# Altium PCB nfc-epd-sm.PcbDoc
Units mil, origin at the board's own origin, x right, y up, seen from the top; angles counter-clockwise.
Board outline 2244.09 x 1133.86 mil, 4 copper layers (Top Layer, GND Plane, Signal 1, Bottom Layer); 86 components, 74 nets, 282 pads, 68 vias.
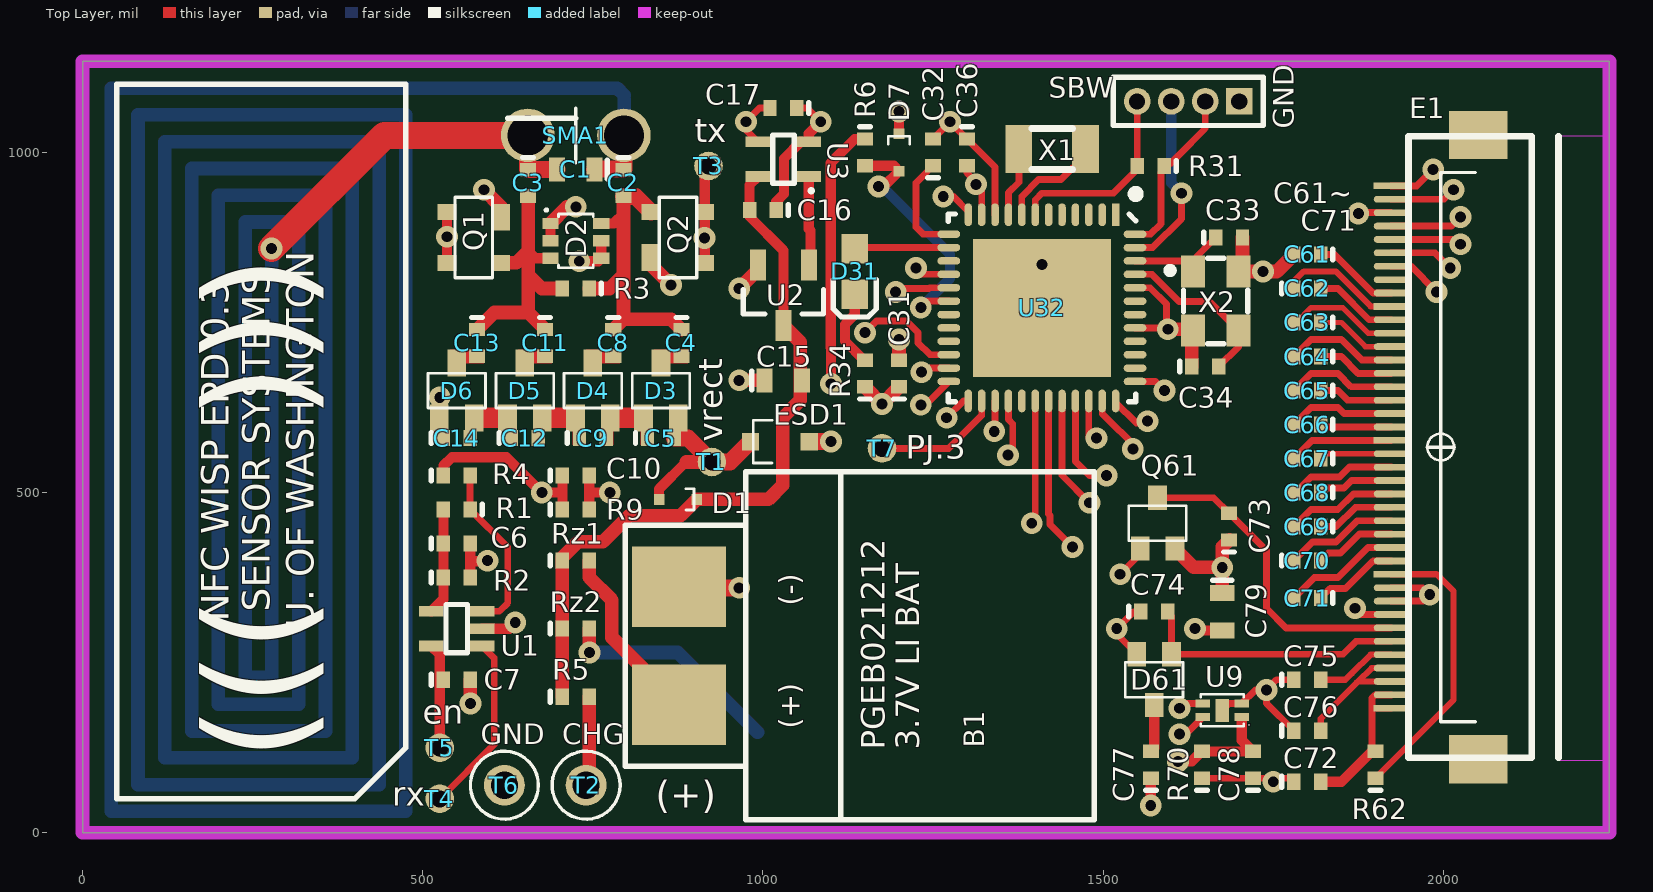
[diagram p0: Top Layer view]
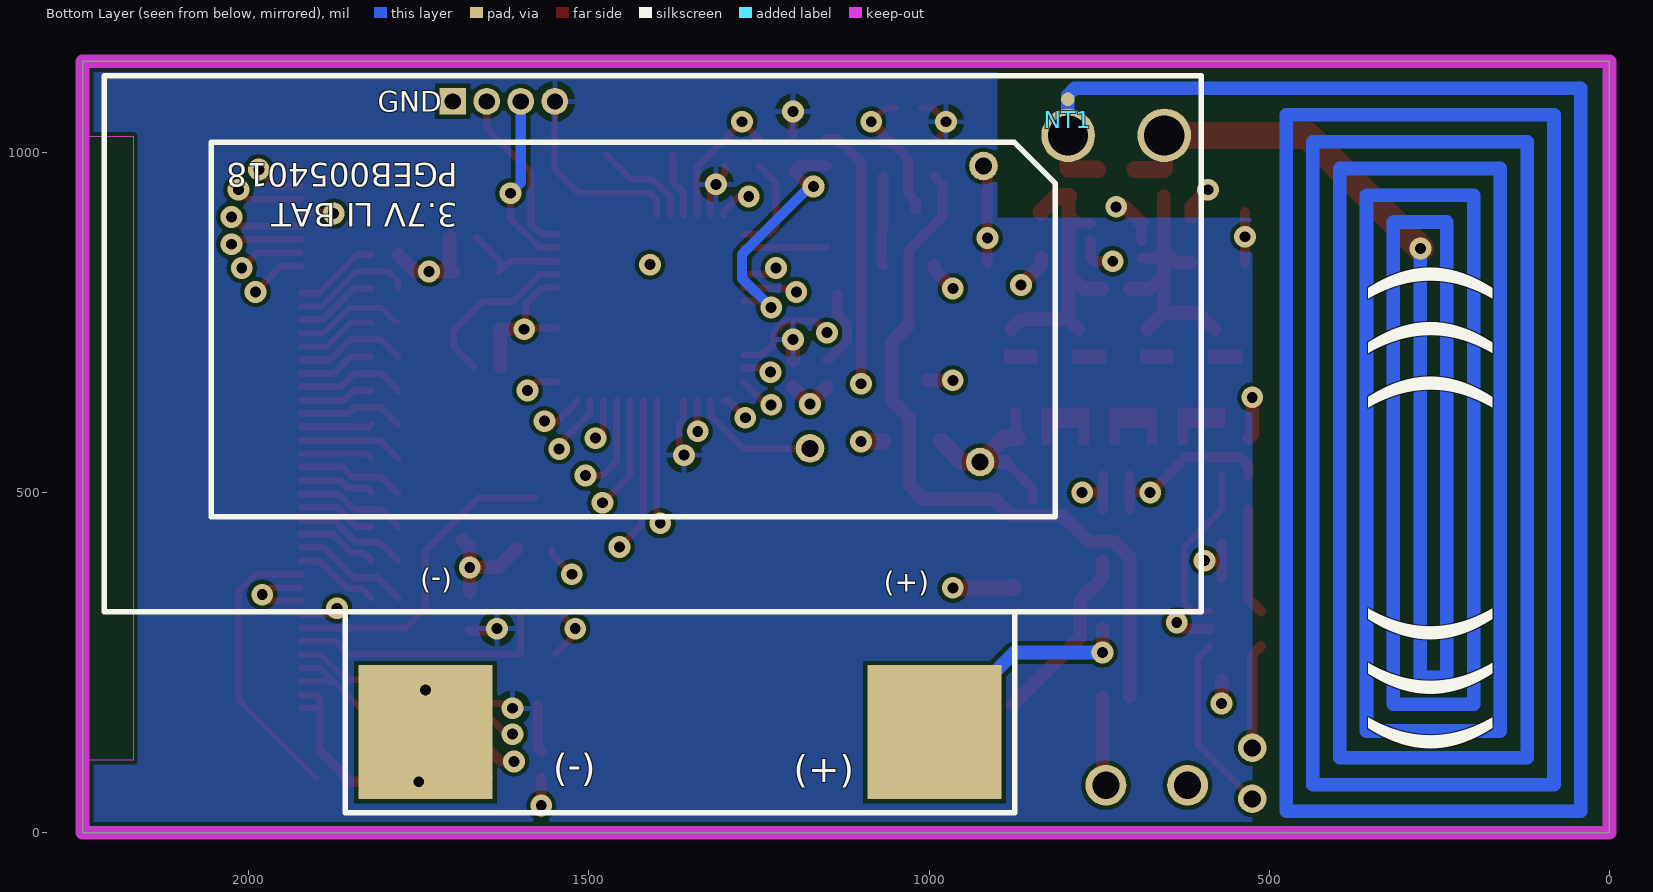
[diagram p1: Bottom Layer view, seen from below]
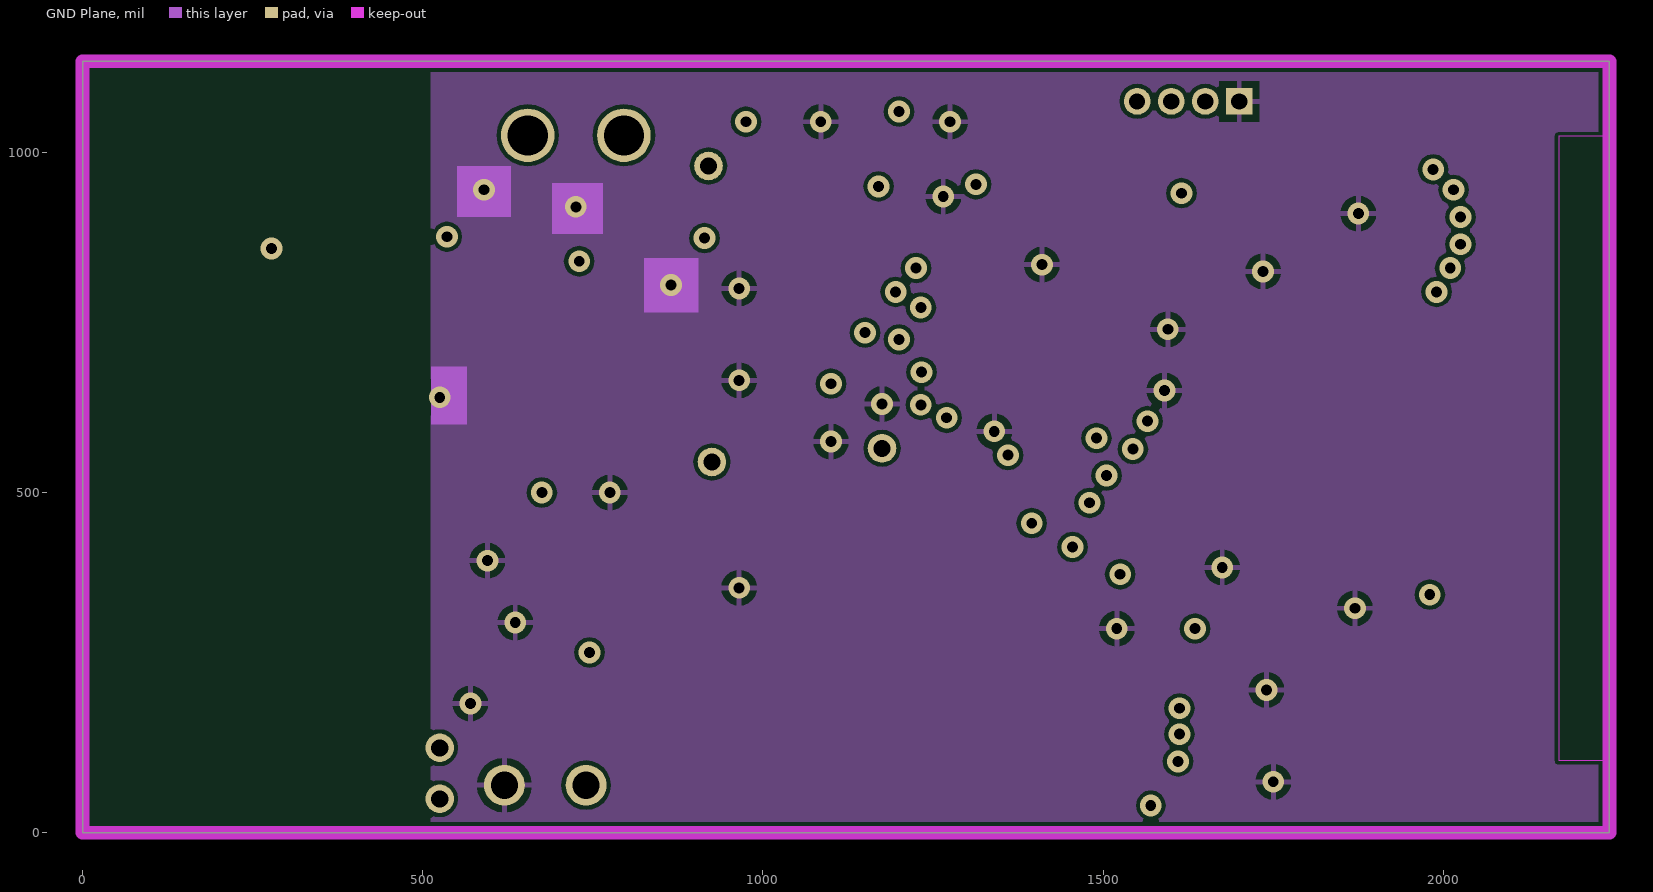
[diagram p2: GND Plane]
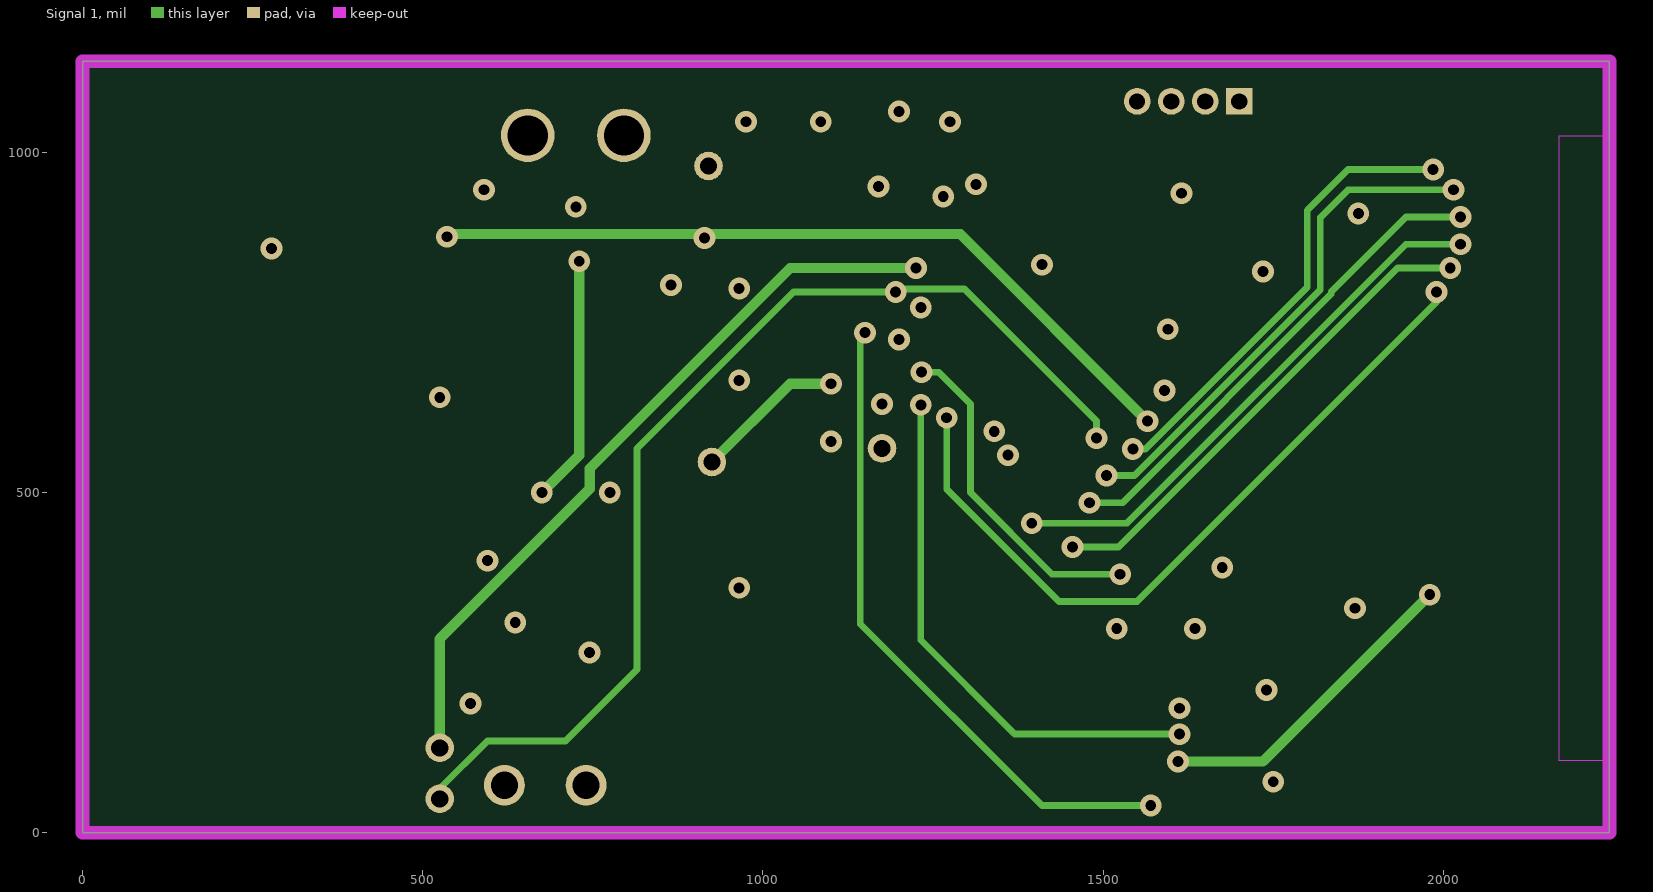
[diagram p3: Signal 1]

## Layer stack, top to bottom
Top Layer: signal copper 1.4
Dielectric: core 12.6, FR-4, Dk 4.8
GND Plane: signal copper 1.4
Dielectric: prepreg 12.6, FR-4, Dk 4.8
Signal 1: signal copper 1.4
Dielectric: core 12.6, FR-4, Dk 4.8
Bottom Layer: signal copper 1.4

## Board outline
0,0 2244.09,0 2244.09,1133.86 0,1133.86

## Design rules (kind name [scope] priority, off if disabled: settings)
Clearance "Clearance~Sunstone Circuits" [All] p1: gap=6 // Sunstone Circuits Minimum Clearance Rule (MLB~4&6 Layer Designs)
HoleSize "HoleSize~Sunstone Circuits" [All] p1: absolutevalues=TRUE maxlimit=251 minlimit=8 maxpercent=80.000 minpercent=20.000 // Sunstone Circuits Hole Size Rule (MLB~4&6 Layer Designs)
HoleSize Testpoint [All] p2: absolutevalues=TRUE maxlimit=100 minlimit=1 maxpercent=80.000 minpercent=20.000
HoleSize TestPointUsage [All] p3: absolutevalues=TRUE maxlimit=100 minlimit=1 maxpercent=80.000 minpercent=20.000
MinimumAnnularRing "MinimumAnnularRing~Sunstone Circuits" [All] p1: minimumring=7 // Sunstone Circuits Minimum Annular Ring (MLB~4&6 Layer Designs)
MinimumSolderMaskSliver [All] p1 off: minsoldermaskwidth=10
PlaneClearance "PlaneClearance~Sunstone Circuits" [All] p1: clearance=12 // Sunstone Circuits Power Plane Clearance Rule (MLB~4&6 Layer Designs)
PlaneConnect "PlaneConnect~Sunstone Circuits" [All] p1: planeconnectstyle=Relief reliefexpansion=10 reliefentries=4 reliefconductorwidth=8 reliefairgap=10 // Sunstone Circuits Power Plane Connect Rule (MLB~4&6 Layer Designs)
PolygonConnect "PolygonConnect~Sunstone Circuits" [All] p1: connectstyle=Relief reliefconductorwidth=8 reliefentries=4 polygonreliefangle="90 Angle" airgapwidth=10 // Sunstone Circuits Polygon Connect Style (MLB~4&6 Layer Designs)
RoutingVias "RoutingVias~Sunstone Circuits" [All] p1: holewidth=16 width=30 viastyle="Through Hole" minholewidth=8 minwidth=24 maxholewidth=20 maxwidth=40 // Sunstone Circuits Routing Vias Rule (MLB~4&6 Layer Designs)
ShortCircuit "ShortCircuit~Sunstone Circuits" [All] p1: allowed=FALSE // Sunstone Circuits Short Circuit Rule~Do Not Allow (MLB~4&6 Layer Designs)
SilkToSilkClearance [All] p1 off: silktosilkclearance=10
SilkToSolderMaskClearance SilkscreenOverComponentPads [IsPad] p1 off: minsilkscreentomaskgap=10 clearancetoexposedcopper=TRUE
SolderMaskExpansion "SolderMaskExpansion~Sunstone Circuits" [All] p1: expansion=3 // Sunstone Circuits Solder Mask Expansion Rule (MLB~4&6 Layer Designs)
ViasUnderSMD "ViasUnderSMD~Sunstone Circuits" [All] p1: allowed=FALSE // Sunstone Circuits Vias Under SMD~Do Not Allow (MLB~4&6 Layer Designs)
Width "Width~Sunstone Circuits" [All] p1: maxlimit=100 minlimit=6 preferedwidth=10 // Sunstone Circuits Minimum Width Rule (MLB~4&6 Layer Designs)
21 further rules are at their usual default settings.

## Classes and differential pairs
component class U_nfc-epd-power: B1 C15 C16 C17 R5 Rz1 Rz2 T2 T6 U2 U3
component class AFE: C1 C2 C3 C4 C5 C6 C7 C8 C9 C10 C11 C12 C13 C14 CV2 D1 D2 D3 D4 D5 D6 ESD1 NT1 Q1 Q2 R1 R2 R3 R4 R9 SMA1 T1 TP8 U1
component class Digital: C31 C32 C33 C34 C35 C36 D7 D31 P35 R6 R31 R34 SBW T3 T4 T5 T7 U32 X1 X2
component class "E-ink Display": C61 C62 C63 C64 C65 C66 C67 C68 C69 C70 C71 C72 C73 C74 C75 C76 C77 C78 C79 D61 E1 Q61 R62 R70 U9

## Components (designator, comment, footprint, x,y, rotation, side; value= is the part's Value field where it differs from the comment)
B1 "Battery" PGEB0121212 975,275 r90 top locked
C1 "Cap" 0603 725,975 r180 top
C2 "Cap" 0402 795,955 r270 top
C3 "Cap" 0402 655,955 r270 top
C4 "Cap" 0402 880,720 r270 top
C5 "Cap" 0402 850,580 r0 top
C6 "Cap" 0402 550,425 r0 top
C7 "Cap" 0402 550,225 r0 top
C8 "Cap" 0402 780,720 r270 top
C9 "Cap" 0402 750,580 r0 top
C10 "Cap" 0402 725,525 r0 top
C11 "Cap" 0402 680,720 r270 top
C12 "Cap" 0402 650,580 r0 top
C13 "Cap" 0402 580,720 r270 top
C14 "Cap" 0402 550,580 r0 top
C15 "Cap" 0603 1030,665 r0 top
C16 "Cap" 0402 1000,915 r180 top
C17 "Cap" 0402 1030,1065 r180 top
C31 "Cap" 0402 1200,675 r90 top
C32 "Cap" 0402 1250,1000 r90 top
C33 "Cap" 0402 1685,875 r0 top
C34 "Cap" 0402 1650,685 r0 top
C36 "Cap" 0402 1300,1000 r270 top
C61 "Cap" 0402 1800,850 r180 top
C62 "Cap" 0402 1800,800 r0 top
C63 "Cap" 0402 1800,750 r180 top
C64 "Cap" 0402 1800,700 r180 top
C65 "Cap" 0402 1800,650 r180 top
C66 "Cap" 0402 1800,600 r180 top
C67 "Cap" 0402 1800,550 r180 top
C68 "Cap" 0402 1800,500 r180 top
C69 "Cap" 0402 1800,450 r180 top
C70 "Cap" 0402 1800,400 r0 top
C71 "Cap" 0402 1800,345 r180 top
C72 "Cap" 0402 1800,75 r0 top
C73 "Cap" 0402 1685,450 r90 top
C74 "Cap" 0402 1575,325 r0 top
C75 "Cap" 0402 1800,225 r0 top
C76 "Cap" 0402 1800,150 r0 top
C77 "Cap" 0402 1570,100 r90 top
C78 "Cap" 0402 1720,100 r90 top
C79 "Cap" 0603 1675,325 r270 top
D1 "RB751S40T1" SOD-523 875,490 r270 top
D2 "BAS70BRW" SOT-363 725,870 r0 top
D3 "HSMS-281C" "SOT-323, HSMS-285C" 850,650 r0 top
D4 "HSMS-281C" "SOT-323, HSMS-285C" 750,650 r0 top
D5 "HSMS-281C" "SOT-323, HSMS-285C" 650,650 r0 top
D6 "HSMS-281C" "SOT-323, HSMS-285C" 550,650 r0 top
D7 "RB751S40T1" SOD-523 1200,1000 r0 top
D31 "LED" "Diode - 0603" 1135,825 r90 top
D61 "BAT54SW" "SOT-323 / SC-70" 1575,225 r180 top
E1 "EPD - Connector" "EPD - Connector" 1996.06,566.93 r0 top locked
ESD1 "MM3Z4V3B" SOD-323 1025,575 r90 top
NT1 "PCB Coil" "Net Tie - 20mil" 796,1048 r90 bottom net-tie
Q1 "BF1105R" SOT-143R 575,875 r90 top
Q2 "BF1105R" SOT-143R 875,875 r270 top
Q61 "2N7002KW" "SOT-323 / SC-70" 1580,455 r0 top
R1 "Res" 0402 550,475 r180 top
R2 "Res" 0402 550,375 r0 top
R3 "Res" 0402 725,800 r180 top
R4 "Res" 0402 550,525 r0 top
R5 "Res" 0402 725,200 r0 top
R6 "Res" 0402 1150,1000 r270 top
R9 "Res" 0402 725,475 r0 top
R31 "Res" 0402 1570,980 r180 top
R34 "Res" 0402 1150,675 r90 top
R62 "Res" 0402 1900,100 r90 top
R70 "Res" 0402 1645,100 r90 top
Rz1 "Res" 0402 725,400 r0 top
Rz2 "Res" 0402 725,300 r0 top
SBW "MHDR1X4" MHDR1X4 1700,1075 r180 top
SMA1 "SMA - Hole - 2 Pin" "SMA - Hole - 2 Pin" 725,1025 r270 top
T1 "Test Point" "Test Point - Super Small" 925,545 r0 top
T2 "Test Point" "Test Point - Small" 740,70 r180 top
T3 "Test Point" "Test Point - Super Small" 920,980 r0 top
T4 "Test Point" "Test Point - Super Small" 525,50 r0 top
T5 "Test Point" "Test Point - Super Small" 525,125 r0 top
T6 "Test Point" "Test Point - Small" 620,70 r180 top
T7 "Test Point" "Test Point - Super Small" 1175,565 r90 top
U1 "NCS2200" SC70-5 550,300 r90 top
U2 "XC61CxxxxxMR-G" "SOT23 - N" 1030,790 r270 top
U3 "NCP583" SC82-AB 1030,990 r90 top
U9 "SIP32431" TDFN-4 1675,180 r90 top
U32 "MSP430F5310" 48-QFN 1410,771.54 r270 top
X1 "XTAL" "XTAL - 2Pin [3.2mm x 1.5mm]" 1425,1005 r180 top
X2 "XTAL 4pin" "XTAL - 4Pin [3.2MM X 2.5MM]" 1665.31,781.54 r270 top

## Footprints (in the part's own frame and the unit in brackets; to place one, negate y for a bottom-side part, rotate by r counter-clockwise, add the part's x,y. Pads: shape width x height; smd on the part's side, far side on the other; paste and mask are expansions set on the pad)
48-QFN [mm]
  rect 5.15x5.15 smd mask+0.07: 0(0,0)
  rect 0.85x0.28 smd mask+0.07: 1(-3.475,2.75)
  oval 0.85x0.28 smd mask+0.07: 2(-3.475,2.25) 3(-3.475,1.75) 4(-3.475,1.25) 5(-3.475,0.75) 6(-3.475,0.25) 7(-3.475,-0.25) 8(-3.475,-0.75) 9(-3.475,-1.25) 10(-3.475,-1.75) 11(-3.475,-2.25) 12(-3.475,-2.75) 25(3.475,-2.75) 26(3.475,-2.25) 27(3.475,-1.75) 28(3.475,-1.25) 29(3.475,-0.75) 30(3.475,-0.25) 31(3.475,0.25) 32(3.475,0.75) 33(3.475,1.25) 34(3.475,1.75) 35(3.475,2.25) 36(3.475,2.75)
  oval 0.28x0.85 smd mask+0.07: 13(-2.75,-3.475) 14(-2.25,-3.475) 15(-1.75,-3.475) 16(-1.25,-3.475) 17(-0.75,-3.475) 18(-0.25,-3.475) 19(0.25,-3.475) 20(0.75,-3.475) 21(1.25,-3.475) 22(1.75,-3.475) 23(2.25,-3.475) 24(2.75,-3.475) 37(2.75,3.475) 38(2.25,3.475) 39(1.75,3.475) 40(1.25,3.475) 41(0.75,3.475) 42(0.25,3.475) 43(-0.25,3.475) 44(-0.75,3.475) 45(-1.25,3.475) 46(-1.75,3.475) 47(-2.25,3.475) 48(-2.75,3.475)
  silkscreen extent -4.4,-3.5 3.5,3.65, body extent -3.5,-3.5 3.5,3.5, height 1
0402 [mm] "Surface Mount; Body 1 x 0.5 mm (LxW typ)"
  rect 0.5x0.6 smd: 1(-0.5,0) 2(0.5,0)
  silkscreen extent -0.95,-0.2 -0.95,0.2, body extent -0.5,-0.25 0.5,0.25, height 0.5
0603 [mm] "Surface Mount; Body 1.6 x 0.8 mm (LxW typ)"
  rect 0.6x0.9 smd: 1(-0.7,0) 2(0.7,0)
  silkscreen extent -1.18,-0.35 -1.18,0.35, body extent -0.8,-0.4 0.8,0.4, height 0.8
"Diode - 0603" [mm] "Diode: Body 1.6 x 0.8 mm (LxW typ)"
  rect 1.1x1 smd: 1(0.85,0) 2(-0.85,0)
  silkscreen extent -1.7,-0.8 -0.3,0.8, body extent -0.8,-0.4 0.8,0.4, height 0.8
"EPD - Connector" [mm] "CONN FPC/FFC 40POS .5MM HORZ SMD, ZIF"
  rect 2.2x1.8 smd: 0(1.4,-11.65) 0(1.4,11.65)
  rect 1.3x0.25 smd: 1(-1.85,9.75) 10(-1.85,5.25) 20(-1.85,0.25) 30(-1.85,-4.75) 40(-1.85,-9.75)
  oval 1.3x0.25 smd: 2(-1.85,9.25) 3(-1.85,8.75) 4(-1.85,8.25) 5(-1.85,7.75) 6(-1.85,7.25) 7(-1.85,6.75) 8(-1.85,6.25) 9(-1.85,5.75) 11(-1.85,4.75) 12(-1.85,4.25) 13(-1.85,3.75) 14(-1.85,3.25) 15(-1.85,2.75) 16(-1.85,2.25) 17(-1.85,1.75) 18(-1.85,1.25) 19(-1.85,0.75) 21(-1.85,-0.25) 22(-1.85,-0.75) 23(-1.85,-1.25) 24(-1.85,-1.75) 25(-1.85,-2.25) 26(-1.85,-2.75) 27(-1.85,-3.25) 28(-1.85,-3.75) 29(-1.85,-4.25) 31(-1.85,-5.25) 32(-1.85,-5.75) 33(-1.85,-6.25) 34(-1.85,-6.75) 35(-1.85,-7.25) 36(-1.85,-7.75) 37(-1.85,-8.25) 38(-1.85,-8.75) 39(-1.85,-9.25)
  silkscreen extent -1.2,-11.6 4.4,11.6, body extent -1.2,-11.6 4.4,11.6, height 2
MHDR1X4 [mm] "Connector; Header; 4 Position"
  rect 1x1 hole 0.6: 1(0,0)
  round 1 hole 0.6: 2(1.27,0) 3(2.54,0) 4(3.81,0)
  silkscreen extent -0.9,-0.9 4.71,0.9
"Net Tie - 20mil" [mil] "Net Tie is used to connect two differnt nets together"
  round 20 smd: 1(-29.53,0) 2(30,0)
  Top Layer lines w20: -30,0 30,0
PGEB0121212 [mm] "Powerstream 10mAh 3.7V battery 2x12x12.5mm"
  rect 3x3.5 smd: 1(2.2,2.5) 2(-2.2,2.5)
  silkscreen extent -6.5,-13 6.5,4.5
SC70-5 [mm] "SC70-5"
  rect 0.4x0.92 smd: 1(-0.65,-0.95) 2(0,-0.95) 3(0.65,-0.95) 4(0.65,0.95) 5(-0.65,0.95)
  silkscreen extent -0.9,-0.4 0.9,0.4, body extent -0.9,-0.4 0.9,0.4, height 1.1
SC82-AB [mm]
  rect 0.4x0.92 smd: 1(-0.65,-0.95) 2(0.65,-0.95) 3(0.65,0.95) 4(-0.65,0.95)
  silkscreen extent -1.18,-1.05 0.9,0.4
"SMA - Hole - 2 Pin" [mm] "SMA port for wisp"
  round 2 hole 1.5: 1(0,1.796) 2(0,-1.796)
  silkscreen extent -1.02,0 1.02,0
SOD-323 [mm] "SOD-322 Footprint"
  rect 0.65x0.65 smd: 1(0,-1.1) 2(0,1.1)
  silkscreen extent -0.8,0.3 0.8,1, body extent -0.7,-0.9 0.7,0.9, height 1
SOD-523 [mm] "SOD-523 Footprint"
  rect 0.4x0.4 smd: 1(0,-0.7) 2(0,0.7)
  silkscreen extent -0.4,0.3 0.4,0.6, body extent -0.4,-0.6 0.4,0.6, height 1
"SOT23 - N" [mm] "SOT23, 3-Leads, Body 2.9x1.3mm, Pitch 0.95mm, Lead Span 2.3mm - Reverse Pinning, IPC Medium Density"
  rect 1.15x0.6 smd: 1(-1.125,0.95) 2(-1.125,-0.95) 3(1.125,0)
  silkscreen extent -0.2,-1.5 0.7,1.5, body extent -0.7,-1.5 0.7,1.5, height 1.1
SOT-143R [mm] "SOT-143R for BF1105R"
  rect 1x0.7 smd: 1(0.75,-1)
  rect 0.6x0.7 smd: 2(-0.95,-1) 3(-0.95,1) 4(0.95,1)
  silkscreen extent -1.5,-0.7 1.5,0.7, body extent -1.5,-0.7 1.5,0.7, height 1.1
"SOT-323 / SC-70" [mm] "SOT-323 / SC-70; 3 Lead Package"
  rect 0.7x0.9 smd: 1(-0.65,-0.95) 2(0.65,-0.95) 3(0,0.95)
  silkscreen extent -1.08,-0.65 1.08,0.65, body extent -1.07,-0.65 1.07,0.65, height 1
"SOT-323, HSMS-285C" [mm] "SOT-323/SC-70; 3 Leads; HSMS-285C"
  rect 0.7x1 smd: 1(-0.65,-1.025) 2(0.65,-1.025) 3(0,1.025)
  silkscreen extent -1.07,-0.65 1.07,0.65, body extent -1.07,-0.65 1.07,0.65, height 1
SOT-363 [mm] "SOT-363 ,SC-88 ,6 Lead"
  rect 0.6x0.42 smd: 1(-0.95,0.65) 2(-0.95,0) 3(-0.95,-0.65) 4(0.95,-0.65) 5(0.95,0) 6(0.95,0.65)
  silkscreen extent -1.15,-1 0.65,1.2, body extent -0.65,-1 0.65,1, height 1
TDFN-4 [mm] "TDFN4 1.2 x 1.6"
  rect 0.3x0.55 smd: 1(-0.25,-0.725) 2(0.25,-0.725) 3(0.25,0.725) 4(-0.25,0.725)
  rect 0.86x0.5 smd: 5(0,0)
  silkscreen extent -0.6,-0.8 0.6,0.8, body extent -0.6,-0.8 0.6,0.8, height 0.55
"Test Point - Small" [mil] "Test Point, 40mil hole, example DK: 5000K-ND"
  round 60 hole 40: 0(0,0)
  silkscreen extent -50,-50 50,50
"Test Point - Super Small" [mil] "25 - 42"
  round 42 hole 25: 0(0,0)
"XTAL - 2Pin [3.2mm x 1.5mm]" [mm] "FC-135   crystal - epson eletronics"
  rect 1x1.8 smd: 1(-1.25,0) 2(1.25,0)
  silkscreen extent -0.76,-0.76 0.76,0.76, body extent -1.6,-0.75 1.6,0.75, height 0.8
"XTAL - 4Pin [3.2MM X 2.5MM]" [mm] "CRYSTAL, 3.2mm x 2.5mm,  4Pin"
  rect 1.2x0.9 smd: 1(-1.1,-0.85) 2(1.1,-0.85) 3(1.1,0.85) 4(-1.1,0.85)
  silkscreen extent -1.6,-1.83 1.6,1.2, body extent -1.6,-1.2 1.6,1.2, height 1

## Part data
B1: library part Powerstream_Battery, "Powerstream Lithium Battery"
C1 C2 C3 C4 C5 C6 C7 C8 C9 C10 C11 C12 C13 C14 C15 C16 C17 C31 C32 C33 C34 C36 C61 C62 C63 C64 C65 C66 C67 C68 C69 C70 C71 C72 C73 C74 C75 C76 C77 C78 C79: "Ceramic Capacitor (Surface Mount)"
D1 D7: "Schottky Diode"
D2: library part "Diode - Array_2", "Diode Array - 2 Pair Series Connection"
D3 D4 D5 D6: "Agilent Schottky Diode, Two in Series, Small Package SOT-323"
D31: library part "Diode - LED", "Typical RED, GREEN, YELLOW, AMBER GaAs LED"
D61: library part "Diode - Array_1", "Diode Array, Two in Series, Small Package SOT-323"
E1: "FPC, 40pin, 0.5mm Pitch - ZIF"
ESD1: "Vz=4.3V, Overvoltage Protection Zener"
NT1: library part "Net Tie - Coil", "Hand draw coil symbol based on a 'Net Tie'"
Q1 Q2: "SOT-143R, N-Channel Dual-Gate Mos-Fets MOSFET"
Q61: library part MOSFET-N, "N-Channel MOSFET"
R1 R2 R3 R4 R5 R6 R9 R31 R34 R62 R70 Rz1 Rz2: "Chip Resistor (Surface Mount)"
SBW: "Header, 4-Pin"
SMA1: "Two pin SMA connector wisp"
T1 T2 T3 T4 T5 T6 T7: "Test Point, large or small foot prints"
U1: "Comparator: On Semi 10uA Comparator"
U2: "Torex IC Supervisor, SOT-23"
U3: "Regulator: Ultra-Low Iq 150mA CMOS LDO Regulator with Enable"
U9: "High Sside Switch - 4TDFN package"
U32: library part "MSP430F5310 - 48Pin", "MSP430 - 48LQFP or 48QFN"
X1: library part "XTAL 2-pins", "Crystal Oscillator - [3.20mm x 1.50mm]"
X2: library part "XTAL 4-pins", "Crystal - 4-Pin Surface Mount"

## Free pads (board coordinates)
  round 20 smd far side: 1(278.37,858.27)
  rect 196.85x196.85 smd far side: 1(1739.96,147.83) 2(991.93,147.83)

## Via types
v1: diameter 32, hole 16, Top Layer to Bottom Layer, tented both sides, 68 vias

## Nets (pads, with @x,y where several pads share a name; then routed paths per layer and width w, separated by ;. In a path a pad name is that pad's centre, name@x,y a point inside that pad or via, vN(x,y) a via of type N, cw(c..) or ccw(c..) an arc to the next point about the centre after c; other vN are vias at no path point)
ANT_NEG: C1.2 C3.1 NT1.2 pad.1@278.37,858.27 SMA1.2 | length 14030.1
  Top Layer w25: SMA1.2 654.29,975.39 654.69,975 C1.2
  Top Layer w40: v1(277.78,858.86) 443.92,1025 SMA1.2@632.07,1025
  Bottom Layer w20: pad.1@278.37,858.27 278.37,228.35 239,228.35 239,897.64 317.74,897.64 317.74,188.98 199.63,188.98 199.63,937.01 357.11,937.01 357.11,149.61 160.26,149.61 160.26,976.38 396.48,976.38 396.48,110.24 120.89,110.24 120.89,1015.75 435.85,1015.75 435.85,70.87 81.52,70.87 81.52,1055.12 475.22,1055.12 475.22,31.5 42.15,31.5 42.15,1094.49 785.51,1094.49 NT1.2@796,1084
ANT_POS: C1.1 C2.1 NT1.1 SMA1.1 | length 92.9
  Top Layer w25: C1.1 752.95,975.39 795.71,975.39 SMA1.1
BAT_BOTTOM: pad.2 Rz2.2 | length 330.6
  Top Layer w20: Rz2.2 744.69,265.31 v1(745,265)
  Bottom Layer w20: v1(745,265) 874.76,265 pad.2
BAT_TOP: B1.2 Rz1.2 | length 266.2
  Top Layer w20: Rz1.2 744.69,375.31 778,342 778,286.96 B1.2
BITLINE: R1.1 R4.2 U1.3 | length 252.7
  Top Layer w10: R4.2 569.69,499 R1.1 625,419.68 625,338 612.59,325.59 U1.3
BITLINE_LPF: C6.1 R1.2 R2.1 U1.4 | length 156.7
  Top Layer w15: U1.4 530.31,343.31 R1.2
C11M: C71.2 E1.28 | length 173.7
  Top Layer w10: C71.2 1810.32,375 1845,375 1889.29,419.29 E1.28
C11P: C71.1 E1.29 | length 126.2
  Top Layer w10: C71.1 1833.69,359 1856.24,359 1896.85,399.61 E1.29
C12M: C70.1 E1.26 | length 167.2
  Top Layer w10: C70.1 1807.5,427.19 1842.19,427.19 1873.66,458.66 E1.26
C12P: C70.2 E1.27 | length 119.7
  Top Layer w10: C70.2 1830.87,411.19 1848.82,411.19 1876.6,438.98 E1.27
C13M: C69.2 E1.24 | length 162.8
  Top Layer w10: C69.2 1805.32,475 1844.75,475 1867.78,498.03 E1.24
C13P: C69.1 E1.25 | length 115.3
  Top Layer w10: C69.1 1842.37,450 1870.72,478.35 E1.25
C14M: C68.2 E1.22 | length 158.4
  Top Layer w10: C68.2 1782.48,500 1805.29,522.81 1847.3,522.81 1861.89,537.4 E1.22
C14P: C68.1 E1.23 | length 110.9
  Top Layer w10: C68.1 1826.35,506.66 1853.78,506.66 1864.83,517.72 E1.23
C15M: C67.2 E1.20 | length 154
  Top Layer w10: C67.2 1807.09,576.77 E1.20
C15P: C67.1 E1.21 | length 106.5
  Top Layer w8: C67.1 1826.77,557.09 E1.21
C16M: C66.2 E1.18 | length 156.9
  Top Layer w10: C66.2 1805.32,625 1845,625 1853.86,616.14 E1.18
C16P: C66.1 E1.19 | length 105
  Top Layer w10: C66.1 1823.23,596.46 E1.19
C21M: C65.2 E1.16 | length 161.3
  Top Layer w10: C65.2 1805.32,675 1845,675 1864.49,655.51 E1.16
C21P: C65.1 E1.17 | length 109.4
  Top Layer w10: C65.1 1845,650 1859.17,635.83 E1.17
C31M: C64.2 E1.14 | length 165.7
  Top Layer w10: C64.2 1805.32,725 1850,725 1880.12,694.88 E1.14
C31P: C64.1 E1.15 | length 113.8
  Top Layer w10: C64.1 1850,700 1874.8,675.2 E1.15
C41M: C63.1 E1.13 | length 118.2
  Top Layer w8: C63.1 1850,750 1885.43,714.57 E1.13
C41P: C63.2 E1.12 | length 167.5
  Top Layer w8: C63.2 1783.89,750 1805.7,771.81 1851.98,771.81 1889.53,734.25 E1.12
C42M: C62.2 E1.11 | length 122.6
  Top Layer w10: C62.2 1845,800 1891.06,753.94 E1.11
C42P: C62.1 E1.10 | length 180.6
  Top Layer w9: C62.1 1780.31,810.31 1795,825 1841.92,825 1893.3,773.62 E1.10
EPD_BUSY: E1.2 U32.33 | length 986.8
  Top Layer w10: U32.33 1459.21,545.79 1480,525 v1(1505,525) ; E1.2 2001.1,931.1 v1(2015,945)
  Signal 1 w10: v1(1505,525) 1545.81,525 1819.09,798.28 1819.09,904.09 1860,945 v1(2015,945)
EPD_DISCHARGE: Q61.1 U32.23 | length 583.6
  Top Layer w10: v1(1233,677) 1238.95,682.95 U32.23 ; v1(1525,380) 1554.41,409.41 Q61.1
  Signal 1 w10: v1(1233,677) 1258,677 1305,630 1305,500 1425,380 v1(1525,380)
EPD_PANEL_ON: U9.4 U32.24 | length 881.2
  Top Layer w10: v1(1232,629) 1238.92,629 U32.24 ; v1@1615,143 1619.3,143 U9.4
  Signal 1 w10: v1(1232,629) 1232,283 1370,145 v1(1612,145)
EPD_PWM: C77.1 U32.22 | length 1168.4
  Top Layer w10: v1(1150,735) 1167,752 1211.18,752 1228,735.18 1228,720 1245.36,702.64 U32.22
  Top Layer w15: v1(1570,40) C77.1
  Signal 1 w10: v1(1150,735) 1143,728 1143,307 1410,40 v1(1570,40)
EPD_RESET: E1.7 U32.25 | length 1214.9
  Top Layer w10: v1(1270,610) 1294.72,634.72 U32.25 ; E1.7 1952.32,832.68 v1(1990,795)
  Signal 1 w10: v1(1270,610) 1270,505 1435,340 1550,340 1990,780 v1(1990,795)
FEED_NEG: C3.2 C11.1 C13.1 D2.3 Q1.2 R3.2 | length 434.8
  Top Layer w15: 655,855 665.59,844.41 D2.3
  Top Layer w20: C13.1 605,764.69 655,764.69 ; Q1.2 637.6,837.6 655,855 ; C3.2 655,855 ; C11.1 655,764.69 ; R3.2 675,800 655,820 ; 655,764.69 655,820 ; 655,820 655,855
FEED_POS: C2.2 C4.1 C8.1 D2.6 Q2.2 R3.1 | length 440.3
  Top Layer w15: D2.6 780.59,895.59 795,910
  Top Layer w20: R3.1 775,800 795,820 ; C8.1 795,754.68 ; C2.2 795,910 795,820 ; C4.1 865,754.68 795,754.68 ; 795,754.68 795,820
  Top Layer w25: C2.2 812.72,935.32 Q2.2
GND: B1.1 C6.2 C7.2 C10.2 C14.1 C15.1 C16.1 C17.1 C31.1 C32.2 C33.2 C34.1 C36.1 C61.2 C72.1 C73.1 C74.1 C75.1 C76.1 C78.1 C79.1 D2.1 D2.2 D6.1 D61.2 E1.3 E1.33 ESD1.1 pad.1@1739.96,147.83 Q1.1 Q2.1 Q61.2 R2.2 R9.2 R34.1 R70.1 SBW.1 T6.0 U1.2 U2.2 U3.2 U9.2 U9.5 U32.0 U32.10 U32.12 U32.27 U32.37 U32.41 U32.44 X2.2 X2.4 | length 2386.6
  Top Layer w10: C17.1 1065,1065 v1(1085,1045) ; C32.2 1275,1044.69 C36.1 1341.1,978.59 U32.10 ; v1(1265,935) 1280,935 1301.73,913.27 U32.12 ; v1(1340,590) 1341.1,591.1 U32.27 ; U32.37 1576.73,663.27 v1(1590,650) ; U32.41 v1@1592.99,742.01 ; U32.44 1568.94,801.06 1592.99,777.01 v1@1592.99,742.01 ; D61.2 1520,291.81 v1(1520,300) 1545,325 C74.1 ; v1(1595,740) v1@1592.99,742.01 ; R70.1 C78.1 1775,80.32 C72.1 ; U9.5 1684.84,189.84 U9.2 1723.7,210 v1(1740,210) ; C76.1 1740,190.32 v1(1740,210) ; C75.1 1755,225 v1(1740,210) ; v1(1870,330) 1879.13,320.87 E1.33 ; v1(1875,910) 1876.42,911.42 E1.3
  Top Layer w15: R2.2 569.69,399 ; C6.2 569.69,399 ; U1.2 627,300 v1(636,309) ; v1(595,400) 594,399 569.69,399 ; D2.2 D2.1 ; R9.2 744.69,500 ; C10.2 744.69,500 ; v1(775,500) 744.69,500 ; C16.1 1019.69,927.68 1031,939 1031,991 1055.59,1015.59 U3.2 1067.4,1027.4 v1(1085,1045)
  Top Layer w20: v1(525,640) 525,585.31 C14.1 ; C7.2 569.69,190.31 v1(570,190) ; v1(590,945) 614.37,920.63 Q1.1 ; D2.1 712.01,920 v1(725,920) ; Q2.1 835.63,834.37 v1(865,805) ; v1(965,665) C15.1 ; v1(965,800) 992.6,827.6 U2.2 ; R34.1 1150,655 v1(1175,630) 1200,655 C31.1 ; v1(1595,740) 1630.08,740 X2.2 1630.32,736.7 C34.1 ; Q61.2 1633.19,390 v1(1675,390) ; C79.1 v1(1675,390) ; C73.1 1675,420.32 v1(1675,390) ; X2.4 X2.4@1698.93,825 ; C33.2 1704.69,830.75 X2.4@1698.93,825 ; C61.2 1755.32,825 v1(1735,825) X2.4@1698.93,825
  Top Layer w25: B1.1 878.19,360 v1(965,360) ; ESD1.1 v1(1100,575)
  other v1: 1750,75 1410,835 1275,1045
LDO_CE: U2.1 U3.1 | length 132.3
  Top Layer w15: U2.1 1070,836.89 1070,885 1067.4,887.6 U3.1
LED1: D31.1 U32.14 | length 123.2
  Top Layer w10: D31.1@1150,860.12 U32.14
NetC4_2: C4.2 D3.3
NetC5_1: C5.1 C9.2 D3.1 D4.2
NetC8_2: C8.2 D4.3
NetC9_1: C9.1 C12.2 D4.1 D5.2
NetC10_1: C10.1 D2.4 D2.5 R4.1 R9.1 | length 689.1
  Top Layer w15: R4.1 530.32,539.32 543,552 623,552 v1(675,500) 704.32,500 705.32,499 ; R9.1 705.32,499 ; C10.1 705.32,499 ; v1(730,840) 757.99,840 D2.4 D2.5
  Signal 1 w15: v1(675,500) 730,555 v1(730,840)
NetC11_2: C11.2 D5.3
NetC12_1: C12.1 C14.2 D5.1 D6.2
NetC13_2: C13.2 D6.3
NetC77_2: C77.2 D61.3 | length 70
  Top Layer w15: C77.2 1575,124.68 D61.3
NetD31_2: D31.2 R34.2 | length 115.9
  Top Layer w15: D31.2 1135,761.72 1120.5,747.22 1120.5,722.78 1148.6,694.69 R34.2
NetR5_2: R5.2 T2.0 | length 131.9
  Top Layer w20: T2.0 744.69,74.69 R5.2
PJ.3: T7.0 U32.26 | length 187.8
  Top Layer w10: T7.0 1273,565 1321.41,613.41 U32.26
RST: R31.1 SBW.2 U32.48 | length 251.4
  Top Layer w10: U32.48 1569.8,879.8 1585,895 1585,970.31 1609.69,995 1650,1035.32 SBW.2
RX: T4.0 U1.1 U32.17 U32.34 | length 1990.5
  Top Layer w10: T4.0 605,130 605,256.81 U1.1 ; v1(1195,795) 1200,800 1243.94,800 1245,801.06 U32.17 ; U32.34 1478.9,581.1 1480,580 v1(1490,580)
  Signal 1 w10: T4.0 525,65 595,135 710,135 815,240 815,565 1045,795 v1(1195,795) 1199,799 1296,799 1490,605 v1(1490,580)
RX_ENABLE: C7.1 T5.0 U1.5 U32.16 | length 1309.9
  Top Layer w10: v1(1225,830) 1234.25,820.75 U32.16
  Top Layer w15: U1.5 525,262.01 T5.0
  Signal 1 w15: T5.0 525,285 745.5,505.5 745.5,535.5 1040,830 v1(1225,830)
SPI_CLK: E1.4 U32.32 | length 994.7
  Top Layer w10: U32.32 1439.53,525.47 v1(1480,485) ; E1.4 2011.73,891.73 v1(2025,905)
  Signal 1 w10: v1(1480,485) 1528.44,485 1835.09,791.66 1835.09,795.09 1945,905 v1(2025,905)
SPI_CS_EPD: E1.1 U32.35 | length 860.7
  Top Layer w10: U32.35 1498.58,616.42 1551,564 v1(1543.63,564) 1541.25,564 v1@1535,557.75 ; E1.1 1960.79,950.79 v1(1985,975)
  Signal 1 w10: v1(1543.63,564) 1562.18,564 1800,801.82 1800,915 1860,975 v1(1985,975)
SPI_MISO: E1.6 U32.31 | length 1050.1
  Top Layer w10: U32.31 1419.84,468.34 1422,466.18 1422,453 v1(1455,420) ; E1.6 1987.64,852.36 v1(2010,830)
  Signal 1 w10: v1(1455,420) 1522.63,420 1932.63,830 v1(2010,830)
SPI_MOSI: E1.5 U32.30 | length 1081.9
  Top Layer w10: v1(1395,455) v1@1396.98,456.98 ; v1@1400.15,460.15 U32.30 ; E1.5 2017.95,872.05 v1(2025,865)
  Signal 1 w10: v1(1395,455) 1535,455 1945,865 v1(2025,865)
TEST: SBW.3 U32.47 | length 264.5
  Top Layer w10: U32.47 1572.75,860.12 1615,902.37 v1(1615,940)
  Bottom Layer w15: SBW.3 1600,955 v1(1615,940)
TX: Q1.3 Q1.4 Q2.3 Q2.4 T3.0 U32.36 | length 1427.2
  Top Layer w10: U32.36 1518.27,632.73 1549,602 1552,605 v1(1565,605)
  Top Layer w15: Q1.3 v1(535.63,876) Q1.4 ; Q2.4 Q2.3 914.37,974.37 T3.0
  Signal 1 w15: v1(535.63,876) 539.63,880 1290,880 v1(1565,605)
  other v1: 914,874
VBAT: C15.2 C16.2 D1.2 R5.1 Rz1.1 Rz2.1 U2.3 U3.4 | length 1072.7
  Top Layer w15: U3.4 980.31,952.13 C16.2 980.31,905.69 1030,856 U2.3
  Top Layer w20: R5.1 Rz2.1 Rz1.1 705.32,404.91 728.22,427.81 764.81,427.81 803.13,466.13 878.69,466.13 D1.2 1008,490 1029,511 1029,610 1055,636 1055,720.71 U2.3
VCL: C61.1 E1.9 | length 127
  Top Layer w10: C61.1 1840,850 1896.69,793.31 E1.9
VCOM: C72.2 E1.39 E1.40 R62.2 | length 231.2
  Top Layer w10: R62.2@1895,119.76 1895,198.04 1899.72,202.76 E1.39 ; 1895,184.67 1896.6,183.07 E1.40
  Top Layer w15: C72.2 1850.24,75 R62.2@1895,119.76
VCOM_DRIVER: E1.30 R62.1 | length 424.3
  Top Layer w9: R62.1 2014.92,195.24 2014.92,355.08 1990.08,379.92 E1.30
VCORE: C32.1 U32.13 | length 153.1
  Top Layer w10: C32.1 1225,955.31 1225,890 1235.2,879.8 U32.13
VDD_EPD: C78.2 E1.31 E1.32 R70.2 U9.1 | length 765
  Top Layer w10: E1.32 1970.55,340.55 v1(1980,350) 1969.76,360.24 E1.31
  Top Layer w15: v1(1610,105) 1630.31,105 R70.2 C78.2 1703.54,136.14 U9.1@1703.54,168.56
  Signal 1 w15: v1(1610,105) 1735,105 v1(1980,350)
VDH: C75.2 E1.36 | length 118.8
  Top Layer w9: C75.2 1855.76,225 1865,234.24 1865.62,234.24 1893.19,261.81 E1.36
VDL: C76.2 E1.37 E1.38 | length 196.9
  Top Layer w9: C76.2 1819.69,167.71 1872.46,220.49 ; E1.38 1875.03,222.44 1894.72,242.13 E1.37
VGH: C73.2 E1.34 Q61.3 | length 472
  Top Layer w10: Q61.3 1662.28,492.4 C73.2 1740,414.69 1740,330 1768.82,301.18 E1.34
VGL: C74.2 D61.1 E1.35 | length 395.6
  Top Layer w10: C74.2 1600.59,319.09 D61.1 1852.4,262.4 1871.5,281.5 E1.35
VRECT: C5.2 D1.1 D3.2 ESD1.2 R6.1 T1.0 | length 860.7
  Top Layer w15: D1.1 847.44,505.44 887,545 ; v1(1100,660) 1100,713.08 1099.5,713.58 1099.5,984.5 1134.69,1019.68 R6.1
  Top Layer w20: 887,545 T1.0
  Top Layer w25: C5.2 890,580 T1.0 951.69,545 ESD1.2
  Signal 1 w15: T1.0 1040,660 v1(1100,660)
VREG: C17.2 C31.2 C36.2 C79.2 D7.2 R31.2 SBW.4 U3.3 U9.3 U32.7 U32.11 U32.28 | length 677.7
  Top Layer w10: U3.3 975,1033.19 v1(975,1045) 995,1065 C17.2 ; C36.2 1300,970 1321.41,948.59 U32.11 ; v1(1360,555) 1367,562 1367,601.18 1360.78,607.4 U32.28 ; U32.7 1400.15,929.92 1410.24,940 1515.31,940 1550,974.69 SBW.4 ; v1(1612,183) 1618.84,189.84 U9.3
  Top Layer w15: D7.2 v1(1200,1060) ; v1(1635,300) 1637.56,297.44 C79.2
  Top Layer w20: C31.2 v1(1200,725)
  other v1: 1313,953
WAKEUP: D7.1 R6.2 U32.18 | length 379.9
  Top Layer w10: v1(1232,772) 1241.38,781.38 U32.18
  Top Layer w15: R6.2 1192.13,980.31 D7.1 1177.56,950 v1(1170,950)
  Bottom Layer w15: v1(1170,950) 1175,950 1275,850 1275,815 v1(1232,772)
XIN: U32.8 X1.1 | length 146.5
  Top Layer w10: U32.8 1380.47,935.47 1405,960 1437.99,960 X1.1@1474.53,996.54
XOUT: U32.9 X1.2 | length 94.5
  Top Layer w10: U32.9 1360.78,940.78 1376.1,956.1 X1.2@1376.1,996.54
XT2_IN: C34.2 U32.45 X2.3 | length 251.4
  Top Layer w10: U32.45 1571.88,820.75 1611.62,781.01 1656,781.01 X2.3 1698.78,714.09 C34.2
XT2_OUT: C33.1 U32.46 X2.1 | length 154.6
  Top Layer w10: U32.46 1616.26,840.43 X2.1@1630.32,826.38 ; X2.1 X2.1@1630.32,826.38 ; C33.1 1630.32,840 X2.1@1630.32,826.38
pads on no net: E1.0 E1.8 U32.1 U32.2 U32.3 U32.4 U32.5 U32.6 U32.15 U32.19 U32.20 U32.21 U32.29 U32.38 U32.39 U32.40 U32.42 U32.43

## Polygon pours and split planes (outlines as drawn)
GND on GND Plane "GND" (solid, pour order 2): 511.81,0 511.81,1133.86 2244.09,1133.86 2244.09,0
VREG on Bottom Layer "GND" (solid, pour order 3): 525,0 2244.09,0 2244.09,1133.86 525,1133.86

## Keep-outs
Keep-Out Layer:
  rectangle: 2169.29,106.3 2244.09,1023.62
  lines w20: 0,0 0,1133.86 2244.09,1133.86 2244.09,0 0,0

## Other copper
Top Layer:
  rectangle net NetC13_2: 540,690 590,710
  rectangle net NetC11_2: 640,690 690,710
  rectangle net NetC8_2: 740,690 790,710
  rectangle net NetC4_2: 840,690 890,710
  rectangle net NetC5_1: 820,570 835,625
  rectangle net NetC9_1: 720,570 735,625
  rectangle net NetC12_1: 620,570 635,625
  rectangle net NetC9_1: 665,570 680,625
  rectangle net NetC5_1: 765,570 780,625
  rectangle net VRECT: 865,570 880,625
  rectangle net NetC12_1: 565,595 635,625
  rectangle net NetC9_1: 665,595 735,625
  rectangle net NetC5_1: 765,595 835,625
GND Plane:
  rectangle net GND: 825,765 905,845
  rectangle net GND: 690,880 765,955
  rectangle net GND: 550,905 630,980
  rectangle net GND: 511.81,600.33 565,685
Bottom Layer:
  pour cut-out: 525,1133.86 525,904.14 899.14,904.14 900,905 900,1135

## Silkscreen, mask and mechanical layers (free items; w line width, h text height)
Top Overlay:
  lines w8: 625,1050 725,1050 ; 50,50 400,50 475,125 475,1100 425,1100 50,1100 50,50
  text "GND" at 1780,1035 h30 r90
  text "tx" at 900,1015 h35
  text "C61~" at 1750,925 h30
  text "C71" at 1790,885 h30
  text "vrect" at 940,575 h35 r90
  text "PJ.3" at 1210,550 h35
  text "SENSOR SYSTEMS" at 275,325 h40 r90
  text "NFC WISP EPD 0.3" at 215,310 h40 r90
  text "U. OF WASHINGTON" at 340,300 h40 r90
  text "en" at 500,160 h35
  text "GND" at 585,130 h30
  text "CHG" at 705,130 h30
  text "(((    )))" at 199,106 h150 r270
  text "rx" at 455,40 h35
Bottom Overlay:
  lines w8: 873.82,325 873.82,29.72 1858.07,29.72 1858.07,325 ; 600,325 2212.4,325 2212.4,1112.4 600,1112.4 600,325 ; 814.76,464.37 2054.92,464.37 2054.92,1015 875,1015 814.76,954.76 814.76,464.37
  text "GND" at 1810,1060 h30
  text "PGEB0054018" at 1692.91,984.25 h35 r180
  text "3.7V LI BAT" at 1692.91,925.2 h35 r180
  text "(-)" at 1700.59,384.06 h30 r180
  text "(+)" at 1000,380 h30 r180
  text "(-)" at 1490,110 h40 r180
  text "(+)" at 1110.04,108.46 h40 r180
  text "(((    )))" at 327.54,106 h150 r90

## Text inside footprints (layer, text, board x,y; h text height)
B1: Top Overlay "(+)" at 1053.74,152.95 h30 r90; Top Overlay "(-)" at 1053.74,334.06 h30 r90; Top Overlay "3.7V LI BAT" at 1229.33,121.85 h35 r90; Top Overlay "PGEB021212" at 1179.33,121.85 h35 r90; Top Overlay "(+)" at 931.69,70.28 h40 r180
U9: Top Overlay "o" at 1716.34,156.38 h3.94 r90